# Altium PCB tip_driver.PcbDoc
Units mm, origin at the board's own origin, x right, y up, seen from the top; angles counter-clockwise.
Board outline 30 x 25 mm, 2 copper layers (Top Layer, Bottom Layer), stack 1.5 mm thick; 15 components, 14 nets, 50 pads, 3 vias.
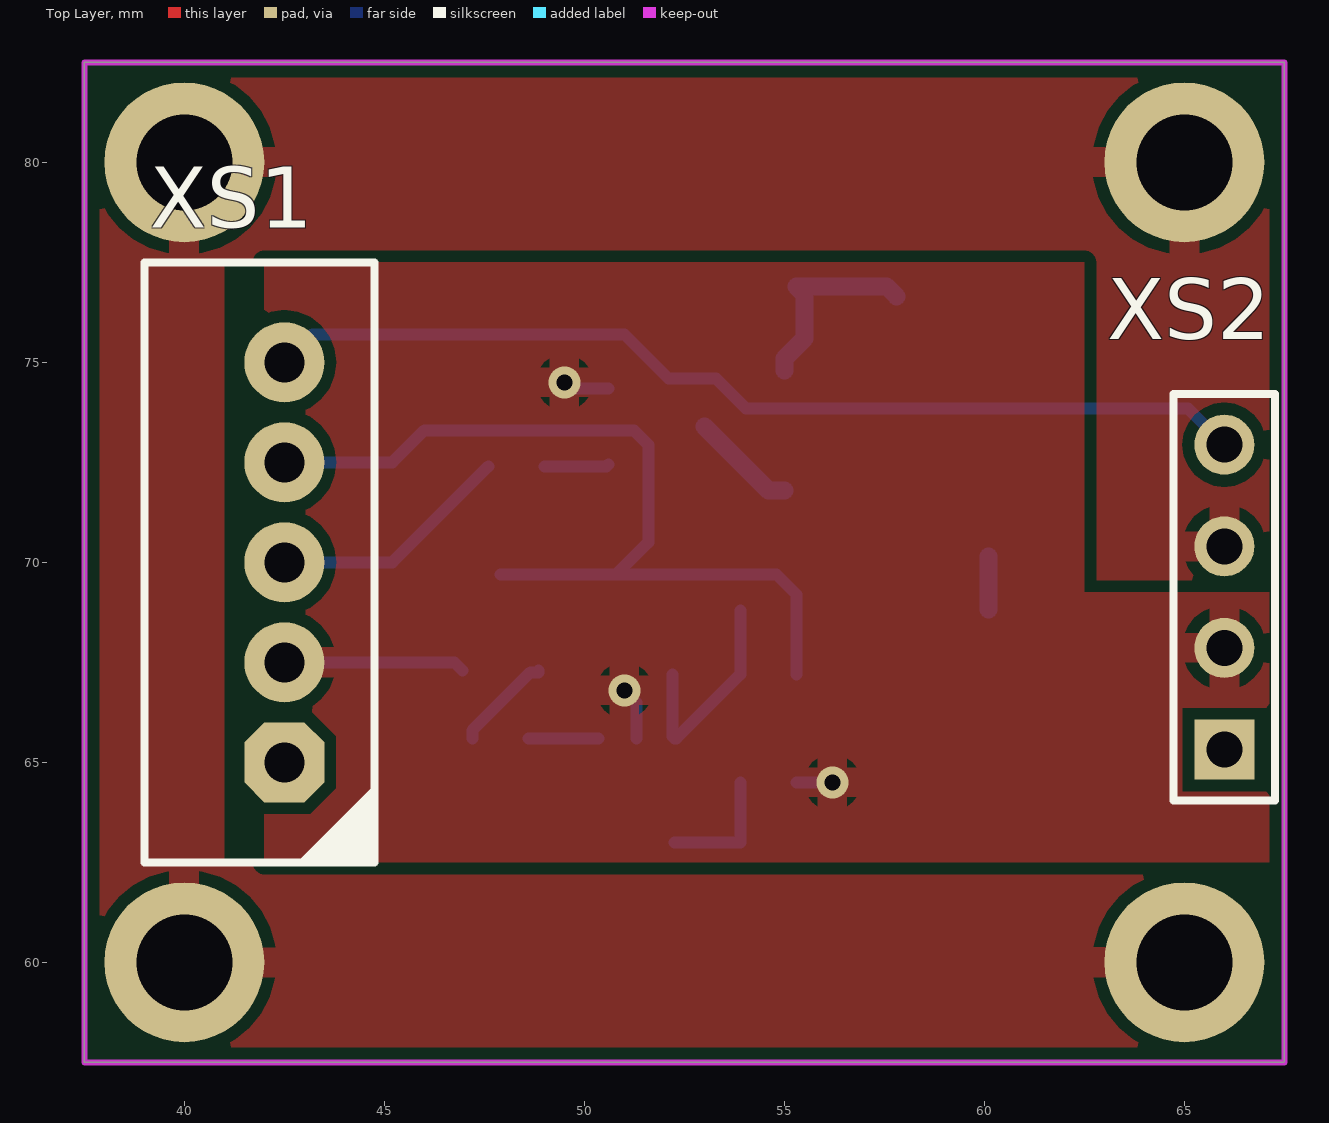
[diagram p0: Top Layer view]
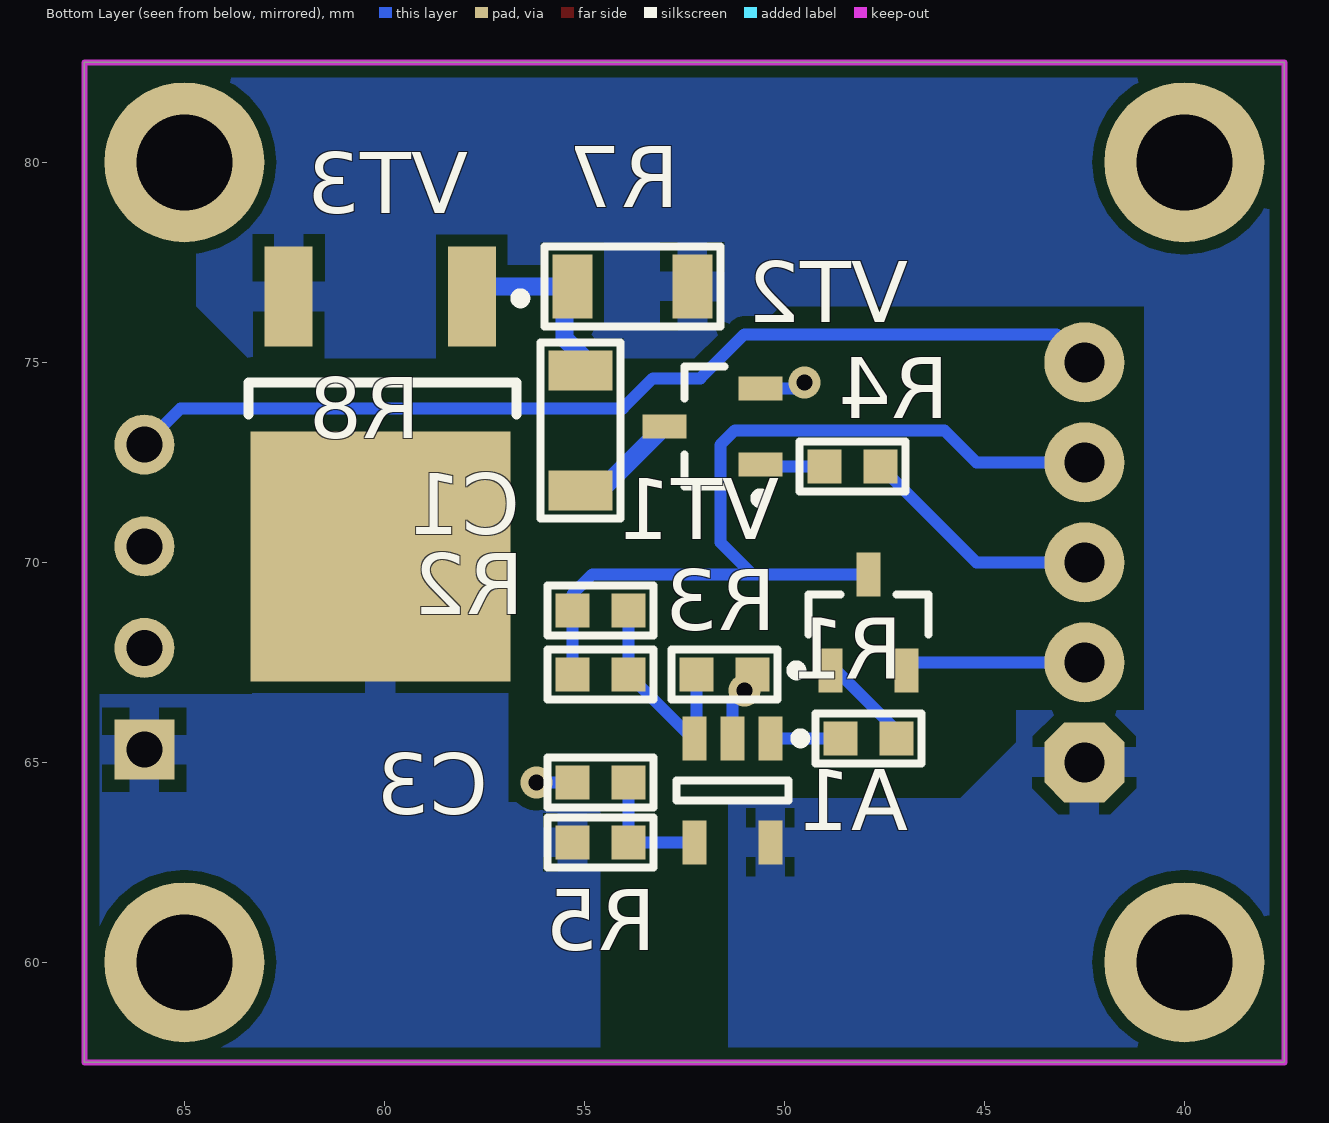
[diagram p1: Bottom Layer view, seen from below]
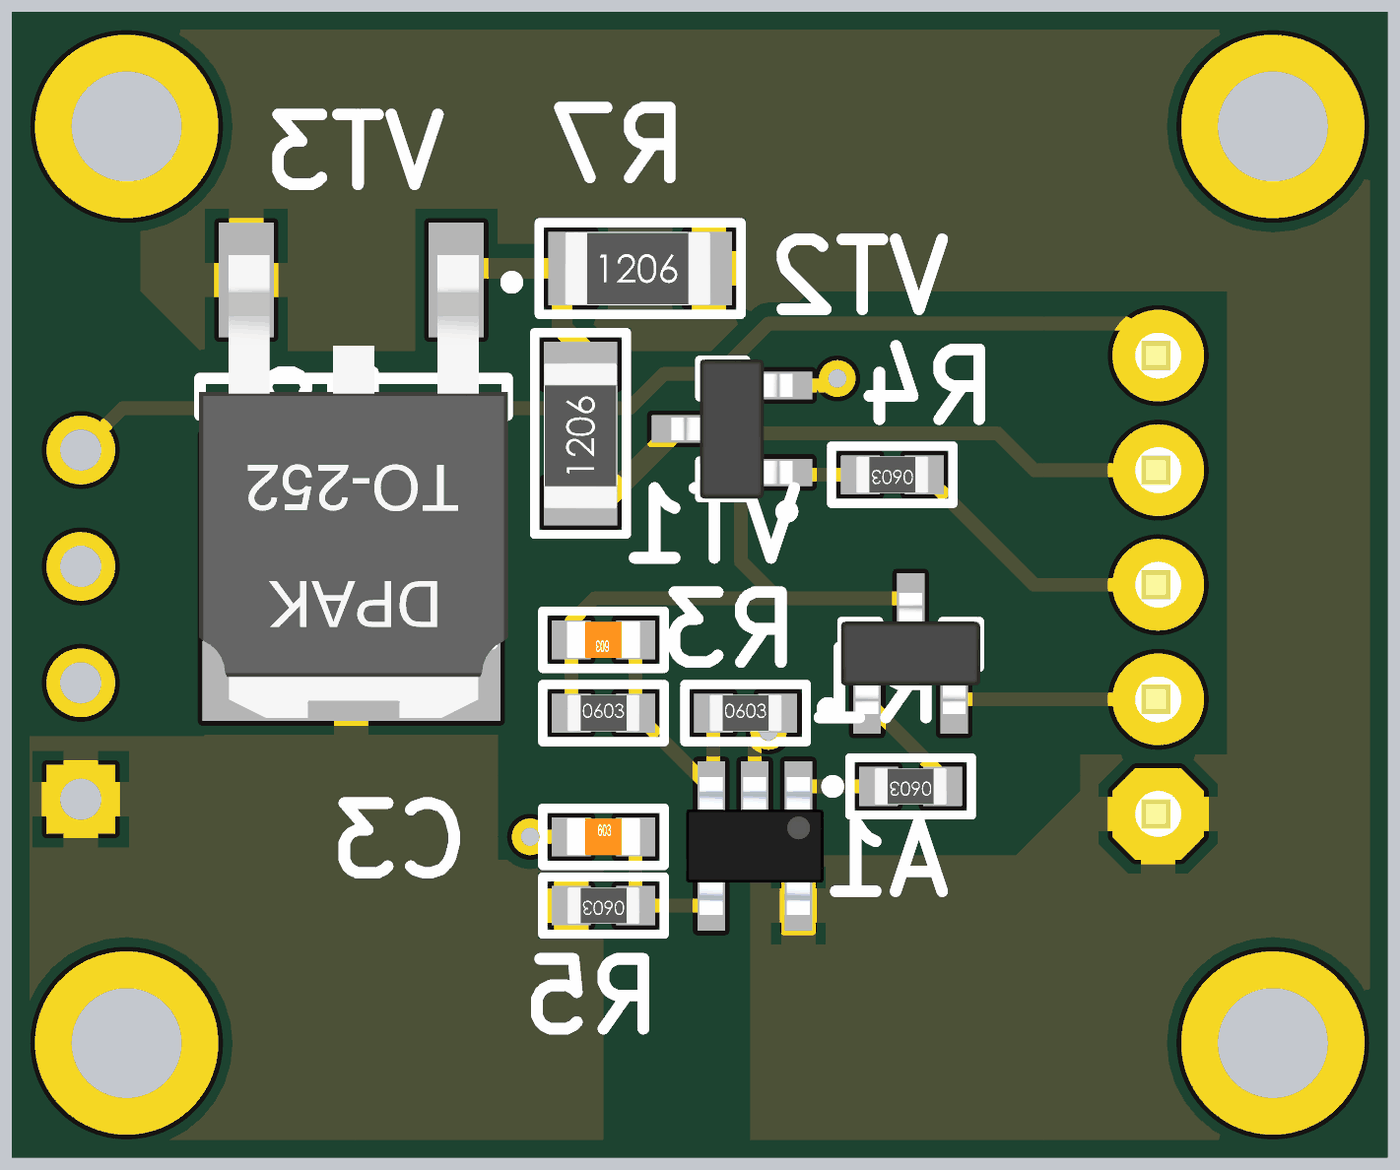
[diagram p2: 3D render of the assembled board from below, using the file's embedded part models]

## Layer stack, top to bottom
Top Layer: signal copper (thickness not stored)
Dielectric 1: dielectric 1.5, FR-4, Dk 4.8
Bottom Layer: signal copper (thickness not stored)

## Board outline
37.5,57.5 67.5,57.5 67.5,82.5 37.5,82.5

## Design rules (kind name [scope] priority, off if disabled: settings)
Clearance [All] p1: gap=0.3 ignorepadtopadclearanceinfootprint=FALSE except(0: Arc-Hole Track-Hole SMDPad-Hole THPad-Hole Via-Hole Fill-Hole Poly-Hole Region-Hole Text-Hole)
PolygonConnect [All] p1: connectstyle=Relief reliefconductorwidth=0.75 reliefentries=4 polygonreliefangle="90 Angle" airgapwidth=0.3
RoutingVias [All] p1: holewidth=0.711 width=1.27 viastyle="Through Hole" minholewidth=0.711 minwidth=1.27 maxholewidth=0.711 maxwidth=1.27
SolderMaskExpansion [All] p1: expansion=0.102
Width [All] p1: maxlimit=0.75 minlimit=0.3 preferedwidth=0.45 minimp=50.000000 maximp=50.000000 favimp=50.000000
30 further rules are at their usual default settings.

## Components (designator, comment, footprint, x,y, rotation, side; value= is the part's Value field where it differs from the comment)
A1 "LMV321ILT" SOT23-5 51.3,64.3 r270 bottom
C1 "100 нФ" "CAP: 0603" 54.6,68.8 r0 bottom
C3 "100 нФ" "CAP: 0603" 54.6,64.5 r180 bottom
R1 "Res" "RES: 0603" 47.9,65.6 r0 bottom
R2 "Res" "RES: 0603" 54.6,67.2 r180 bottom
R3 "Res" "RES: 0603" 51.5,67.2 r180 bottom
R4 "Res" "RES: 0603" 48.3,72.4 r0 bottom
R5 "Res" "RES: 0603" 54.6,63 r0 bottom
R7 "Res" "RES: 1206" 53.8,76.9 r180 bottom
R8 "Res" "RES: 1206" 55.1,73.3 r90 bottom
VT1 "FDV303N" SOT23 47.9,68.5 r90 bottom
VT2 "FDV303N" SOT23 51.8,73.4 r0 bottom
VT3 "p-mosfet" DPAK 60.1,73.4 r270 bottom
XS1 "X5" "CON: CWF-5" 42.5,70 r90 top
XS2 "X4" HDR1X4 66,65.32 r90 top

## Footprints (in the part's own frame and the unit in brackets; to place one, negate y for a bottom-side part, rotate by r counter-clockwise, add the part's x,y. Pads: shape width x height; smd on the part's side, far side on the other; paste and mask are expansions set on the pad)
"CAP: 0603" [mm]
  rect 0.85x0.85 smd: 1(-0.7,0) 2(0.7,0)
  silkscreen extent -1.33,-0.63 1.33,0.63, body extent -0.8,-0.4 0.8,0.4, height 0.3
"CON: CWF-5" [mm]
  oct 2x2 hole 1: 1(-5,0)
  round 2 hole 1: 2(-2.5,0) 3(0,0) 4(2.5,0) 5(5,0)
  round 0.5 on Top Overlay: ""(-8,-2.1)
  silkscreen extent -7.5,-2.25 7.5,3.5, body extent -7.5,-2.25 7.5,3.5, height 7.05
DPAK [mm]
  rect 2.5x1.2 smd: 1(-3.25,2.29) 3(-3.25,-2.29)
  rect 6.25x6.5 smd: 2(3.25,0)
  round 0.5 on Mech1: ""(-3.2,2.9)
  silkscreen extent -3.32,-3.3 -0.3,3.62, body extent -3.8,-3.32 6.3,3.42, height 2.37
HDR1X4 [mm] "Connector; Header; 4 Position"
  rect 1.5x1.5 hole 0.9: 1(0,0)
  round 1.5 hole 0.9: 2(2.54,0) 3(5.08,0) 4(7.62,0)
  silkscreen extent -1.27,-1.27 8.89,1.27
"RES: 0603" [mm]
  rect 0.85x0.85 smd: 1(-0.7,0) 2(0.7,0)
  silkscreen extent -1.33,-0.63 1.33,0.63, body extent -0.8,-0.4 0.8,0.4, height 0.44
"RES: 1206" [mm]
  rect 1x1.6 smd: 1(-1.5,0) 2(1.5,0)
  silkscreen extent -2.2,-1 2.2,1, body extent -1.65,-0.8 1.55,0.8, height 0.47
SOT23 [mm]
  rect 1.1x0.6 smd: 1(-1.2,0.95) 2(-1.2,-0.95) 3(1.2,0)
  round 0.5 on Mech1: ""(-0.9,1.1)
  silkscreen extent -1.32,-1.5 0.7,1.92, body extent -1.32,-1.52 1.32,1.52, height 1.12
SOT23-5 [mm] "pitch 0.95 mm"
  rect 1.1x0.6 smd: 1(-1.3,0.95) 2(-1.3,0) 3(-1.3,-0.95) 4(1.3,-0.95) 5(1.3,0.95)
  round 0.5 on Mech1: ""(-1.1,1.1)
  silkscreen extent -1.42,-1.4 0.25,1.82, body extent -1.5,-1.5 1.5,1.5, height 1.3

## Part data
A1: library part single_channel_op_amp
C1 C3: library part C_const
VT1 VT2: library part n-mosfet

## Free pads (board coordinates)
  round 4 hole 2.4: 2(40,80) 3(40,60) 4(65,60) 5(65,80)

## Via types
v1: diameter 0.8, hole 0.4, Top Layer to Bottom Layer, 3 vias

## Nets (pads, with @x,y where several pads share a name; then routed paths per layer and width w, separated by ;. In a path a pad name is that pad's centre, name@x,y a point inside that pad or via, vN(x,y) a via of type N, cw(c..) or ccw(c..) an arc to the next point about the centre after c; other vN are vias at no path point)
GND: A1.2 C3.1 R3.2 VT1.2 VT2.2 XS1.2 XS2.2 | length 7.9
  Bottom Layer w0.3: XS1.2 46.75,67.5 VT1.2 ; v1(49.5,74.5) 49.65,74.35 VT2.2 ; v1(51,66.8) 51.3,66.5 A1.2 ; C3.1 v1(56.2,64.5)
GROUND: pad.2 pad.3 pad.4 pad.5 XS2.3 | length 0.2
  Top Layer w0.75: XS2.3 XS2.3@66,70.625
NetA1_1: A1.3 C1.1 R2.2 R3.1 | length 5.5
  Bottom Layer w0.3: R3.1 52.2,65.65 A1.3 52.3,65.6 R2.2 C1.1
NetA1_3: A1.4 C3.2 R5.1 | length 3.2
  Bottom Layer w0.3: A1.4 R5.1 C3.2
NetA1_4: A1.1 R1.2 | length 1.7
  Bottom Layer w0.3: R1.2 A1.1
NetA1_5: A1.5 R7.2 VT3.3 XS1.1
NetC1_2: C1.2 R2.1 VT1.3 XS1.4 | length 22.8
  Bottom Layer w0.3: XS1.4 45.2,72.5 46,73.3 51.236,73.3 51.6,72.936 51.6,70.5 50.8,69.7 ; VT1.3 50.8,69.7 ; R2.1 C1.2 55.3,69.2 54.8,69.7 50.8,69.7
NetR1_1: R1.1 VT1.1 | length 2.5
  Bottom Layer w0.3: R1.1 47.2,65.8 48.65,67.25 48.85,67.25 VT1.1
NetR4_1: R4.1 XS1.3 | length 6.1
  Bottom Layer w0.3: XS1.3 45.2,70 R4.1
NetR4_2: R4.2 VT2.1 | length 1.6
  Bottom Layer w0.3: R4.2 50.55,72.4 VT2.1
NetR5_2: R5.2 VT3.2 XS2.1 | length 1.3
  Bottom Layer w0.45: VT3.2@60.1,68.825 VT3.2
NetR7_1: R7.1 R8.2 VT3.1 | length 5
  Bottom Layer w0.45: R8.2@55,74.8 55,75.1 55.5,75.6 55.5,76.7 R7.1 57.56,76.9 VT3.1
NetR8_1: R8.1 VT2.3 | length 2.7
  Bottom Layer w0.45: VT2.3 54.6,71.8 R8.1@55,71.8
NetXS1_5: XS1.5 XS2.4 | length 24.9
  Bottom Layer w0.3: XS1.5 43.2,75.7 51,75.7 52.1,74.6 53.286,74.6 54.036,73.85 65.09,73.85 XS2.4
pads on no net: A1. VT1. VT2. VT3. XS1.

## Polygon pours and split planes (outlines as drawn)
NetA1_5 on Bottom Layer "Bottom Layer-NetA1_5" (solid, pour order 4): 44.2,66.3 41,66.3 41,76.4 50.1,76.4 51.4,75.1 63.4,75.1 64.7,76.4 64.7,82.5 37.5,82.5 37.5,57.5 51.4,57.5 51.4,64.1 45.6,64.1 44.2,65.5
NetR5_2 on Bottom Layer "Bottom Layer-NetR5_2" (solid, pour order 2): 56.9,73.3 56.9,64 54.6,64 54.6,57.5 67.5,57.5 67.5,66.7 63.3,66.7 63.3,73.3
GROUND on Top Layer "Top Layer-GROUND" (solid, pour order 10): 67.5,57.5 67.5,62.5 41,62.5 41,77.5 62.5,77.5 62.5,69 67.5,69 67.5,82.5 37.5,82.5 37.5,57.5
GND on Top Layer "Top Layer-GND 1" (solid, pour order 8): 62.5,69.25 67.5,69.25 67.5,62.5 62.5,62.5
GND on Top Layer "Top Layer-GND" (solid, pour order 0): 62.5,77.5 62.5,62.5 42,62.5 42,77.5

## Keep-outs
Keep-Out Layer:
  the board outline again, w0.15